# Altium PCB ADC-RDC.PcbDoc (part 2 of 2)
Units mm, origin at the board's own origin, x right, y up, seen from the top; angles counter-clockwise.
Board outline 88 x 48 mm, 4 copper layers (Top Layer, Int1, Int2, Bottom Layer), stack 1.48 mm thick; 188 components, 156 nets, 726 pads, 250 vias.
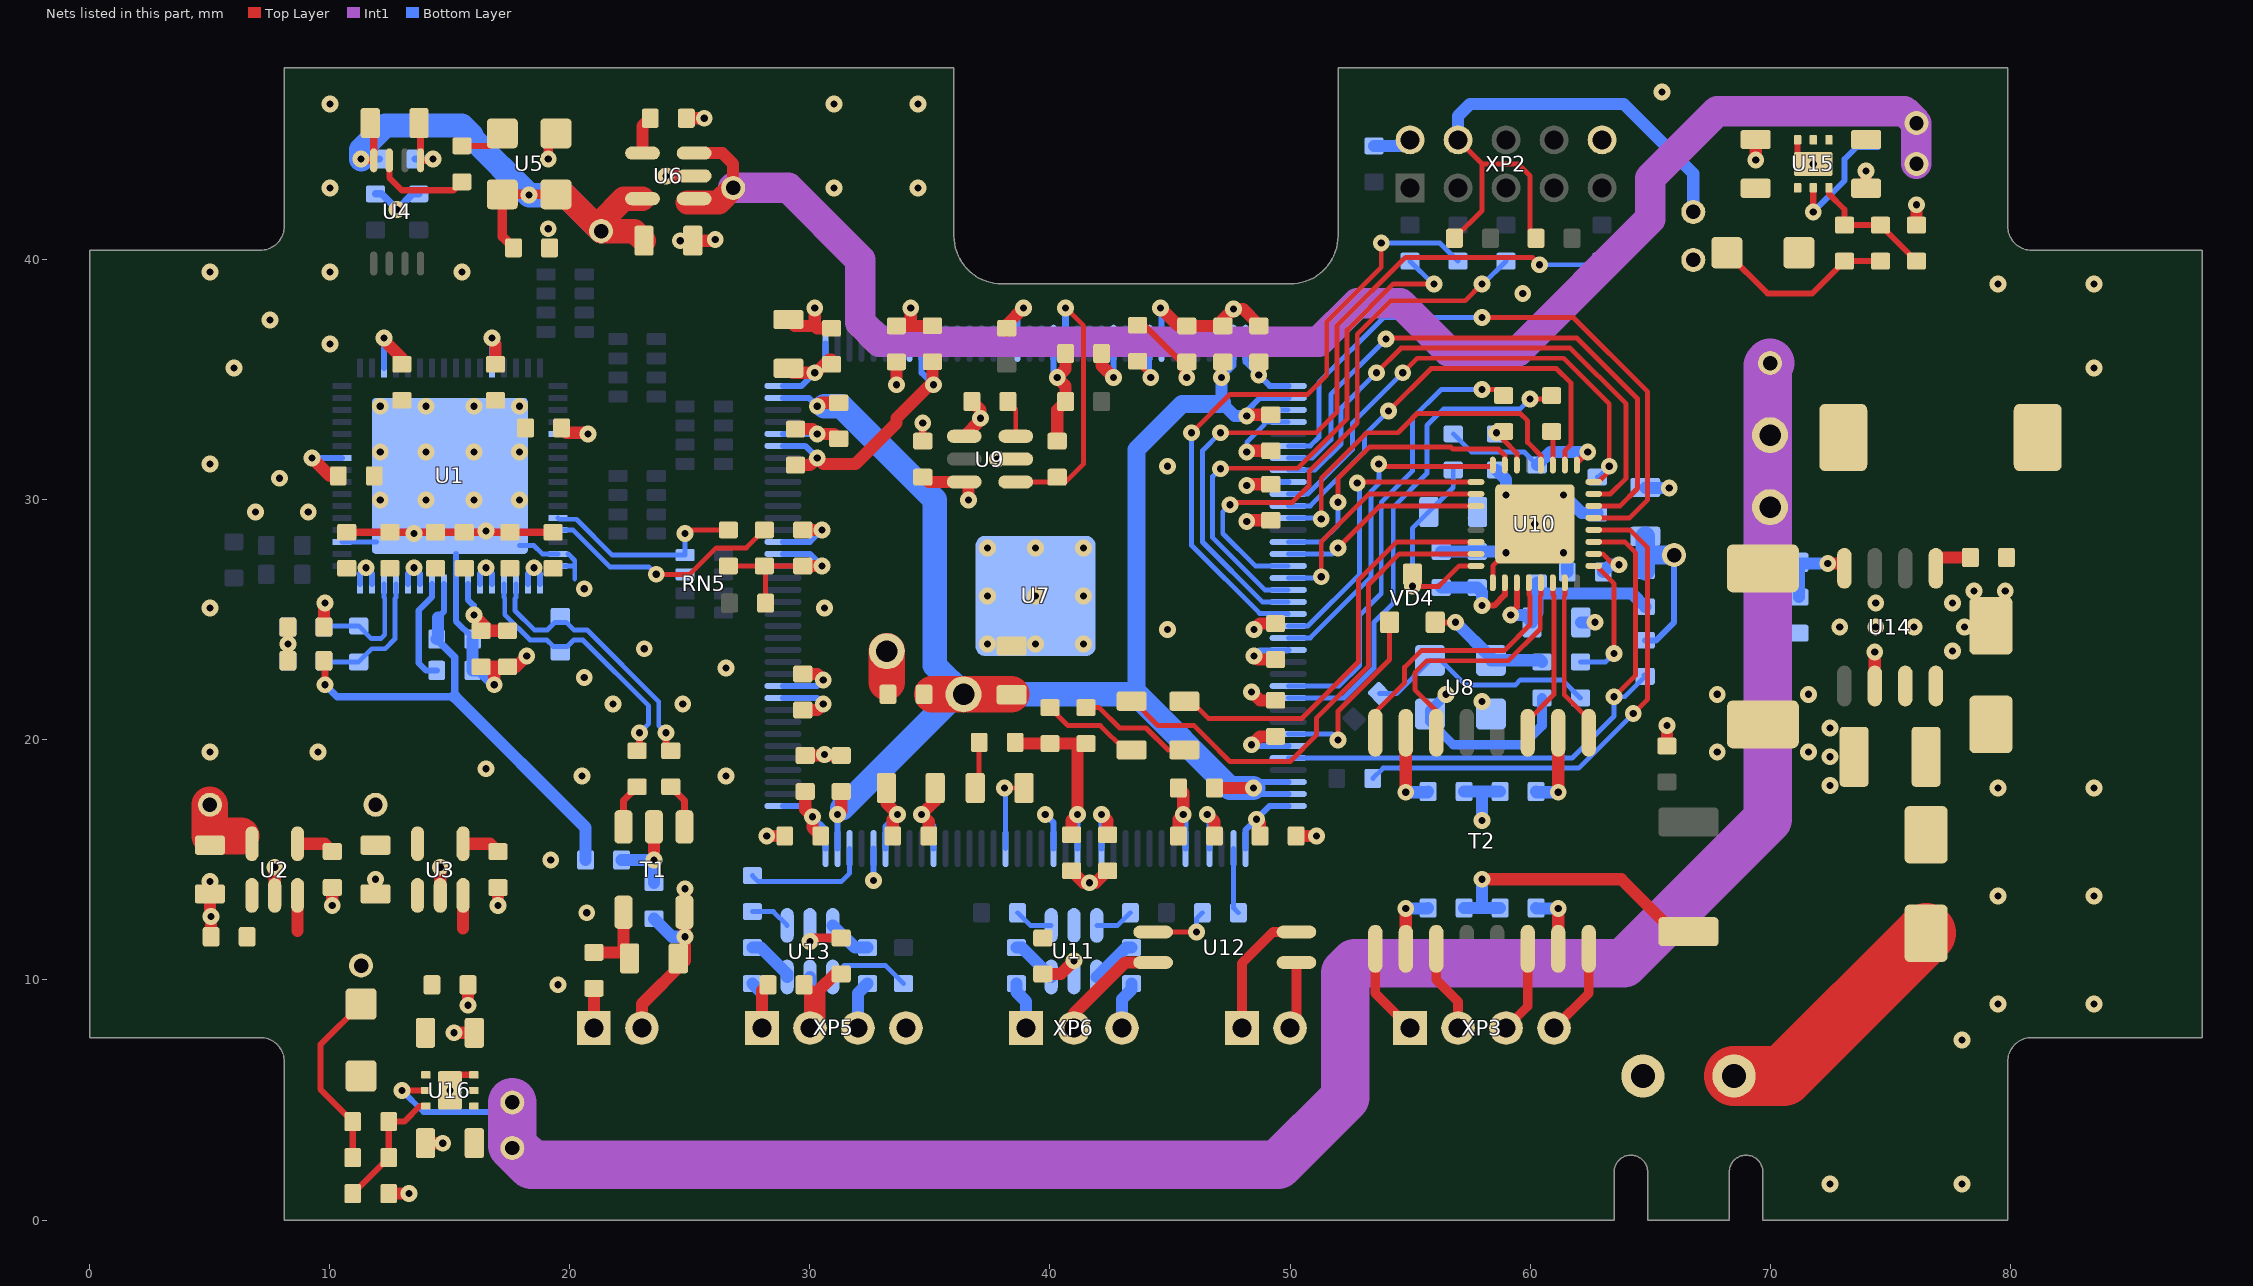
[diagram p4: the nets of this part, all layers, seen from the top]

## Via types
v1: diameter 0.7, hole 0.3, Top Layer to Bottom Layer, tented both sides, 250 vias

## Nets (pads, with @x,y where several pads share a name; then routed paths per layer and width w, separated by ;. In a path a pad name is that pad's centre, name@x,y a point inside that pad or via, vN(x,y) a via of type N, cw(c..) or ccw(c..) an arc to the next point about the centre after c; other vN are vias at no path point) (continued)
GND: C2.2 C4.1 C5.1 C6.2 C8.1 C9.1 C10.1 C11.1 C12.1 C13.1 C14.1 C15.1 C16.1 C17.1 C18.1 C19.1 C20.1 C21.1 C22.1 C23.1 C24.1 C27.1 C28.1 C29.1 C30.1 C31.1 C32.1 C33.1 C34.1 C35.1 C36.1 C37.1 C38.1 C39.1 C40.1 C41.1 C42.1 C43.1 C44.2 C45.1 C46.1 C47.1 C48.1 C49.1 C50.1 C51.1 C52.2 C53.1 C54.1 C55.1 C56.1 C57.1 C58.2 C59.1 C60.1 C61.2 C62.2 C63.2 C64.1 C66.1 C67.1 C68.1 C69.1 C70.2 C71.1 C72.1 C74.2 C75.2 C77.2 C78.2 C80.2 C81.2 FB2.2 R2.2 R5.1 R12.1 R14.1 R19.1 R30.1 R40.2 R41.2 R42.2 R52.1 R54.2 R56.2 R58.2 T1.4 TP6.1 U1.0 U1.3 U1.47 U1.48 U1.56 U2.2 U3.2 U4.5 U5.2 U6.2 U7.0 U7.3 U7.4 U7.42 U7.53 U7.63 U7.68 U7.83 U7.95 U7.104 U7.116 U7.125 U7.133 U7.137 U7.142 U8.2 U9.2 U10.1 U10.33 U11.2 U12.2 U13.2 U14.6 U15.6 U15.7 U16.6 U16.7 VD6.1 XP1.2 XP2.2 XP2.10 XP5.2 XP5.4 XP6.2 | length 150.4
  Top Layer w0.203: U10.1@58.45,26.55 58.45,27.25 v1(59,27.8) v1(60.2,29)
  Top Layer w0.254: U16.7@15.4,6.05 U16.6@16,6.05 ; U15.7@71.15,44.4 U15.6@71.15,45
  Top Layer w0.305: C16.1@10.7,28.65 C17.1@12.5,28.65 C18.1@14.4,28.65 C19.1@15.6,28.65 C20.1@17.5,28.65 C21.1@19.3,28.65 ; C31.1@13.716,45.7 13.775,45.641 U4.5@13.775,44.15 14.25,44.15 v1(14.3,44.2) ; C60.1@34.7,32.45 v1(34.7,33.2) ; v1(37.8,31.7) U9.2@38.575,31.7
  Top Layer w0.4: v1(19.1,44.2) 19.1,44.952 U5.2@19.418,45.27
  Top Layer w0.5: C6.2@9.75,24.7 9.75,25.65 v1(9.8,25.7)
  Top Layer w0.508: v1(5,14.1) C15.1@5,13.584 5,12.7 v1(5.05,12.65) C13.1@5.05,11.8 ; U2.2@7.7,13.525 v1(7.7,14.7) ; v1(10.1,13.1) C14.1@10.1,13.85 ; C24.1@11.9,13.584 v1(11.9,14.2) ; R58.2@12.45,1.1 v1(13.3,1.1) ; C80.2@13.984,3.2 v1(14.7,3.2) ; U3.2@14.6,13.525 v1(14.6,14.7) ; v1(15.166,7.8) C81.2@16.016,7.8 ; v1(15.75,8.95) C22.1@15.75,9.8 ; C5.1@16.3,23.05 16.85,23.05 ; v1(16.85,22.3) 16.85,23.05 ; v1(17,13.1) C23.1@17,13.85 ; v1(18.2,23.5) 17.75,23.05 16.85,23.05 ; XP1.2@23,8 23,9 24.8,10.8 v1(24.8,11.8) v1(24.8,13.8) ; v1(24,43.5) U6.2@25.175,43.5 ; v1(24.6,40.8) 26,40.8 v1(26.05,40.85) ; C27.1@24.85,45.9 v1(25.6,45.9) ; v1(28.2,16) C45.1@28.95,16 ; C52.2@29.1,37.516 29.366,37.25 30.2,37.25 ; C34.1@29.4,32.95 30.1,32.95 v1(30.3,32.75) 31,32.75 C56.1@31.2,32.55 ; C35.1@29.7,22.75 30.3,22.75 v1(30.55,22.5) ; C33.1@29.7,28.75 v1(30.5,28.75) ; R52.1@29.75,9.8 30,9.55 XP5.2@30,8 30.4,8.4 30.4,9.6 31.05,10.25 C72.1@31.3,10.25 ; C46.1@29.8,19.35 C55.1@31.3,19.35 ; v1(30.2,38) 30.2,37.25 ; C47.1@30.9,37.15 30.3,37.15 30.2,37.25 ; C48.1@33.6,37.25 34.2,37.25 ; v1(34.2,38) 34.2,37.25 ; C43.1@34.95,16 34.95,16.6 v1(34.65,16.9) 35.216,17.466 C44.2@35.216,18 ; C32.1@35.1,37.25 34.2,37.25 ; R19.1@38.2,37.05 38.2,37.3 v1(38.9,38) ; C42.1@40.9,14.55 41.4,14.05 v1(41.65,14.05) 41.9,14.05 C41.1@42.4,14.55 ; XP6.2@41,8 41,8.6 43.13,10.73 U12.2@44.3,10.73 ; C50.1@42.15,36.1 42.15,35.6 v1(42.65,35.1) ; v1(44.6,38) 45.35,37.25 C57.1@47.2,37.25 ; C40.1@45.35,16 45.35,16.7 v1(45.55,16.9) 45.55,17.8 C54.1@45.35,18 ; C57.1@47.15,37.275 47.15,37.45 v1(47.65,37.95) 48.05,37.95 48.7,37.3 C49.1@48.7,37.25 ; v1@48.2,29.15 C36.1@49.2,29.15 ; v1@48.3,32.05 C53.1@49.2,32.05 ; v1(48.4,22) 48.75,21.65 C38.1@49.4,21.65 ; v1(48.5,24.6) 48.75,24.85 C37.1@49.4,24.85 ; C39.1@50.25,16 v1(51.1,16) ; FB2.2@65.7,19.75 v1(65.7,20.6) ; v1(69.4,44.166) C78.2@69.4,45.016 ; C77.2@74,42.984 v1(74,43.7) ; U14.6@74.365,22.25 v1(74.365,23.665) ; R56.2@76.1,41.45 v1(76.1,42.3)
  Bottom Layer w0.203: U1.3@10.5,28.25 U1.0@11.95,28.25 ; U1.0@17.9,28.1 18.5,28.1 18.851,27.749 U1.47@19.5,27.75 ; U1.48@19.5,27.25 20.2,27.25 ; 19.926,27.75 20.2,27.476 20.2,27.25 ; 20.2,26.7 20.2,27.25 ; v1(48.2,32) 48.2,32.4 48.925,33.125 48.925,33.25 ; U7.4@49.925,33.25 48.925,33.25 ; U7.3@49.925,33.75 49.1,33.75 48.925,33.575 48.925,33.25
  Bottom Layer w0.254: C8.1@15.95,24.25 15.25,24.95 U1.56@15.25,26.5 ; U7.83@28.875,22.25 30.3,22.25 v1(30.55,22.5) ; U7.95@28.875,28.25 30,28.25 v1(30.5,28.75) ; U7.104@28.875,32.75 v1(30.3,32.75) ; v1(32.65,14.15) U7.68@32.65,15.475 ; U7.116@34.15,36.525 v1@34.15,37.95 ; v1(34.65,16.9) 35.15,16.4 U7.63@35.15,15.475 ; U7.125@38.65,36.525 38.65,37.75 v1(38.9,38) ; v1(39.8,16.9) 40.15,16.55 U7.53@40.15,15.475 ; v1(42.65,35.1) U7.133@42.65,36.425 ; v1(44.6,38) 44.65,37.95 U7.137@44.65,36.525 ; v1(45.55,16.9) 45.65,16.8 U7.42@45.65,15.475 ; U7.142@47.15,36.525 47.15,37.45 v1(47.65,37.95) ; U1.56@15.25,26.5 15.25,27.75 U1.56@15.25,26.5
  Bottom Layer w0.305: R12.1@11.9,42.75 12.15,42.75 v1(12.8,42.1) 13.45,42.75 R14.1@13.7,42.75 ; C30.1@13.55,44.2 v1(14.3,44.2)
  Bottom Layer w0.4: v1(56.5,21.9) 55.83,21.23 U8.2@55.83,21.082 55.83,20.77 56.8,19.8 59.7,19.8 60.5,20.6 C59.1@60.5,21.75
  Bottom Layer w0.5: C8.1@15.95,24.2 R5.1@15.95,22.9 16.25,22.9 v1(16.85,22.3) ; R30.1@53.5,44.75 54.75,44.75 XP2.2@55,45 ; C67.1@62.116,24.9 v1(62.7,24.9) ; C68.1@64.8,30.516 64.816,30.5 v1(65.8,30.5)
  Bottom Layer w0.508: C2.2@23.5,12.55 24.25,11.8 v1(24.8,11.8) ; XP5.2@30,8 U13.2@30,10.125 ; C63.2@56.3,27.85 C64.1@57.8,27.85 58.95,27.85 v1(59,27.8) v1(61.4,27.8) 61.55,27.65 R40.2@61.55,27 ; C62.2@57.25,17.85 58,17.85 ; v1(58,16.65) 58,17.85 ; R41.2@58.6,31.25 59,30.85 v1(59,30.2) ; C61.2@58.75,17.85 58,17.85 ; v1(61.4,30.2) 62.15,29.45 R42.2@62.8,29.45
  other v1: 72.5,1.5 78,1.5 15,5.4 78,7.5 79.5,9 83.5,9 19.5,9.8 20.7,12.8 79.5,13.5 83.5,13.5 19.2,15 79.5,18 83.5,18 72.5,18.1 20.5,18.5 26.5,18.5 16.5,18.8 72.5,19.3 30.6,19.4 5,19.5 9.5,19.5 67.8,19.5 71.6,19.5 72.5,20.5 21.8,21.5 24.7,21.5 67.8,21.9 71.6,21.9 20.6,22.6 26.5,23 77.6,23.7 23.1,23.8 37.4,24 39.4,24 41.4,24 44.9,24.6 72.9,24.7 74.4,24.7 76,24.7 78.1,24.7 5,25.5 30.6,25.5 74.4,25.7 77.6,25.7 37.4,26 39.4,26 41.4,26 78.5,26.2 79.8,26.2 20.6,26.3 37.4,28 39.4,28 41.4,28 13.5,28.6 16.5,28.7 48.2,29.1 6.9,29.5 9.1,29.5 12.1,30 14,30 16,30 17.9,30 7.9,30.9 44.9,31.4 5,31.5 12.1,32 14,32 16,32 17.9,32 12.1,33.9 14,33.9 16,33.9 17.9,33.9 6,35.5 83.5,35.5 10,36.5 7.5,37.5 59.7,38.6 79.5,39 83.5,39 5,39.5 10,39.5 15.5,39.5 19.1,41.3 10,43 31,43 34.5,43 71.8,44 10,46.5 31,46.5 34.5,46.5 65.5,47
INT_VDD_1_2: C63.1 C64.2 U10.2 | length 4
  Top Layer w0.254: v1(58,25.6) 58.5,25.6 58.95,26.05 U10.2@58.95,26.55
  Bottom Layer w0.508: C63.1@56.3,26.35 C64.2@57.8,26.35 58,26.15 v1(58,25.6)
LED0: U10.30 VD2.2 | length 17.5
  Top Layer w0.203: VD2.2@45.6,21.616 45.884,21.616 46.6,20.9 50.5,20.9 52.846,23.246 52.846,26.649 54.447,28.25 U10.30@57.75,28.25
LED1: U10.31 VD3.2 | length 21.4
  Top Layer w0.203: VD3.2@43.4,21.616 43.482,21.616 44.498,20.6 46.005,20.6 46.547,20.059 46.547,20.053 47.5,19.1 50,19.1 51.1,20.2 51.1,20.9 53.27,23.07 53.27,26.47 54.55,27.75 U10.31@57.75,27.75
LED_FPGA: U7.57 VD1.2 | length 3.4
  Top Layer w0.203: v1(38.1,18) VD1.2@38.916,18
  Bottom Layer w0.203: v1(38.1,18) 38.15,17.95 U7.57@38.15,15.475
MDC: R27.2 U10.12 | length 21.7
  Top Layer w0.203: U10.12@62.65,28.75 64.15,28.75 64.898,28.002 64.898,21.702 64.9,21.7 v1(64.3,21.1)
  Bottom Layer w0.203: R27.2@53.45,18.4 53.877,18.827 62.027,18.827 v1(64.3,21.1)
MDIO: R36.2 U7.32 U10.11 | length 25.1
  Top Layer w0.203: U10.11@62.65,28.25 63.95,28.25 64.4,27.8 64.4,22.7 v1(63.5,21.8)
  Bottom Layer w0.203: U7.32@49.925,19.25 61.75,19.25 63.5,21 v1(63.5,21.8) 63.95,21.8 R36.2@64.8,22.65 R36.2@64.75,22.7
MRn: R34.1 U9.3 | length 1.6
  Top Layer w0.203: R34.1@38.25,34.1 38.575,33.775 U9.3@38.575,32.65
N_POWER_ON: R46.1 U7.38 | length 2.8
  Bottom Layer w0.203: U7.38@47.65,15.475 47.65,13 R46.1@47.85,12.8
nCONF: R20.2 U7.129 U9.1 | length 11.4
  Top Layer w0.203: U9.1@38.575,30.75 40.65,30.75 41.4,31.5 41.4,37.25 v1(40.65,38)
  Bottom Layer w0.3: U7.129@40.65,36.525 v1(40.65,38)
NetC2_1: C2.1 R4.1 T1.2 | length 3.7
  Top Layer w0.508: v1(23.5,15) T1.2@23.5,16.378
  Bottom Layer w0.508: R4.1@22.15,15 v1(23.5,15) C2.1@23.5,14.05
NetC4_2: C4.2 C5.2 U1.55 | length 3.1
  Top Layer w0.508: v1(16,25.2) 16.65,24.55 C4.2@17.4,24.55
  Bottom Layer w0.254: U1.55@15.75,26.5 15.75,25.85 16,25.6 v1(16,25.2)
NetC6_1: C6.1 R6.1 R7.1 R8.1 | length 2.8
  Top Layer w0.4: R8.1@8.25,23.3 C6.1@8.25,24.7
  Bottom Layer w0.4: R7.1@8.25,23.3 R6.1@8.25,24.7
  other v1: 8.25,24
NetC14_2: C14.2 U2.4 | length 1.6
  Top Layer w0.508: U2.4@8.65,15.675 9.775,15.675 C14.2@10.1,15.35
NetC23_2: C23.2 U3.4 | length 1.6
  Top Layer w0.508: U3.4@15.55,15.675 16.675,15.675 C23.2@17,15.35
NetC27_2: C27.2 U6.4 | length 1.6
  Top Layer w0.508: U6.4@23.025,44.45 23.025,45.575 C27.2@23.35,45.9
NetC61_1: C61.1 T2.2 | length 2.6
  Top Layer w0.508: v1(61.175,17.825) T2.2@61.175,19.5
  Bottom Layer w0.508: C61.1@60.25,17.85 60.275,17.825 v1(61.175,17.825)
NetC62_1: C62.1 T2.7 | length 2.6
  Top Layer w0.508: v1(54.825,17.825) T2.7@54.825,19.5
  Bottom Layer w0.508: v1(54.825,17.825) 55.725,17.825 C62.1@55.75,17.85
NetC65_1: C65.1 R35.2 R37.2 | length 12.2
  Top Layer w0.508: v1(58,14.2) 63.8,14.2 65.986,12.014 C65.1@66.6,12.014
  Bottom Layer w0.508: R37.2@57.25,13 58,13 ; v1(58,14.2) 58,13 ; R35.2@58.75,13 58,13
NetC73_1: C73.1 U14.1 | length 2.9
  Top Layer w0.508: U14.1@76.9,27.6 C73.1@78.35,27.6 U14.1@76.9,27.6
NetC73_2: C73.2 L1.1 U14.8 VD6.2
NetC76_2: C76.2 R55.1 R56.1 U15.3 | length 5.4
  Top Layer w0.254: U15.3@72.45,43 72.45,42.75 73.1,42.1 R55.1@73.1,41.45 C76.2@74.6,41.45 R56.1@76.1,39.95
NetC79_2: C79.2 R57.1 R58.1 U16.3 | length 5.4
  Top Layer w0.254: R58.1@10.95,1.1 C79.2@12.45,2.6 R57.1@12.45,4.1 13.1,4.1 13.75,4.75 U16.3@14,4.75
NetL2_1: L2.1 U15.1
NetL3_1: L3.1 U16.1
NetR1_1: R1.1 T1.3 | length 1.9
  Top Layer w0.305: R1.1@24.2,18.05 24.77,17.48 T1.3@24.77,16.378
NetR3_1: R3.1 T1.1 | length 1.9
  Top Layer w0.305: T1.1@22.23,16.378 22.23,17.48 R3.1@22.8,18.05
NetR5_2: R5.2 U1.58 | length 4.4
  Bottom Layer w0.254: U1.58@14.25,26.5 14.25,25.95 13.7,25.4 13.7,23.2 14,22.9 R5.2@14.45,22.9
NetR15_1: R15.1 U5.3 | length 1.9
  Top Layer w0.254: R15.1@15.5,44.75 16.662,44.75 U5.3@17.182,45.27
NetR15_2: R15.2 U4.7 | length 4.1
  Top Layer w0.254: U4.7@12.475,44.15 12.475,43.425 13,42.9 15.15,42.9 R15.2@15.5,43.25
NetR28_1: R28.1 R29.1 U8.3 | length 9.8
  Bottom Layer w0.203: R28.1@53.73,21.93 54.442,21.93 U8.3@55.83,23.318 56.282,23.318 57.303,22.297 59.397,22.297 59.6,22.5 61.35,22.5 R29.1@62.1,21.75
NetR33_2: R33.2 VD1.1 | length 2
  Top Layer w0.203: VD1.1@36.884,18 37.05,18.166 R33.2@37.05,19.9
NetR35_1: R35.1 T2.15 | length 2.6
  Top Layer w0.508: T2.15@61.175,11.3 v1(61.175,12.975)
  Bottom Layer w0.508: R35.1@60.25,13 60.275,12.975 v1(61.175,12.975)
NetR37_1: R37.1 T2.10 | length 2.6
  Top Layer w0.508: T2.10@54.825,11.3 v1(54.825,12.975)
  Bottom Layer w0.508: v1(54.825,12.975) 55.725,12.975 R37.1@55.75,13
NetR40_1: R40.1 U10.10 | length 2
  Top Layer w0.203: U10.10@62.65,27.75 63.025,27.75 63.475,27.3 v1(63.7,27.3)
  Bottom Layer w0.508: R40.1@63.05,27 63.35,27.3 v1(63.7,27.3)
NetR43_1: R43.1 VD2.1 | length 4.8
  Top Layer w0.203: R43.1@41.5,21.35 42.05,21.35 42.9,20.5 44,20.5 44.916,19.584 VD2.1@45.6,19.584
NetR44_1: R44.1 VD3.1 | length 4.1
  Top Layer w0.203: R44.1@40,21.35 40.75,20.6 42.1,20.6 43.116,19.584 VD3.1@43.4,19.584
NetR46_2: R46.2 U12.1 | length 2.7
  Top Layer w0.203: U12.1@44.3,12 v1(46.1,12)
  Bottom Layer w0.203: v1(46.1,12) 46.1,12.55 R46.2@46.35,12.8
NetR51_1: R51.1 U13.4 | length 1.7
  Bottom Layer w0.203: R51.1@27.6,12.85 28.475,12.85 U13.4@29.05,12.275
NetR53_1: R53.1 R54.1 U14.4 | length 3.1
  Top Layer w0.508: v1(72.4,27.35) U14.4@72.895,27.35
  Bottom Layer w0.508: R54.1@71.2,25.95 R53.1@71.2,27.25 ; R53.1@71.2,27.35 R53.1@71.2,27.25 ; v1(72.4,27.35) 71.3,27.35 R53.1@71.2,27.25
NetTP4_1: TP4.1 VD5.1 | length 10.5
  Top Layer w2.5: TP4.1@68.5,6 70.55,6 VD5.1@76.5,11.95
NetU12_4: U12.4 XP4.1 | length 5.5
  Top Layer w0.4: XP4.1@48,8 48,10.7 49.3,12 U12.4@50.269,12
nRST_Eth: U7.30 VD4.1 | length 8
  Top Layer w0.203: v1(52,20) 52,21.2 54.15,23.35 VD4.1@54.15,24.9
  Bottom Layer w0.203: U7.30@49.925,20.25 51.75,20.25 v1(52,20)
nRSTEth: C70.1 R45.1 U10.32 VD4.3 | length 8.6
  Top Layer w0.203: v1(55.1,26.4) 56.2,26.4 57.05,27.25 U10.32@57.75,27.25
  Bottom Layer w0.203: v1(55.1,26.4) 55.1,28.816 56.8,30.516 R45.1@56.8,31.25
nSTAT: R24.2 U7.136 | length 2.3
  Top Layer w0.203: R24.2@43.6,35.75 44.2,35.15 v1(44.2,35.1)
  Bottom Layer w0.203: U7.136@44.15,36.525 44.15,35.15 v1(44.2,35.1)
PHY_XI: R29.2 U10.9 | length 5.5
  Top Layer w0.203: U10.9@62.75,27.25 63.5,26.5 v1(63.5,23.6)
  Bottom Layer w0.203: R29.2@62.1,23.25 63.15,23.25 v1(63.5,23.6)
POWER_GND: U12.3 XP4.2 | length 2.8
  Top Layer w0.4: XP4.2@50,8 50.269,8.269 U12.3@50.269,10.73
RX+RJ_45_3: T2.11 XP3.2 | length 3.7
  Top Layer w0.4: T2.11@56.095,11.3 56.095,10.005 57,9.1 XP3.2@57,8
RX-RJ_45_6: T2.9 XP3.1 | length 3.9
  Top Layer w0.4: T2.9@53.555,11.3 53.555,9.445 XP3.1@55,8
RX_C: R38.1 U7.27 | length 20.8
  Top Layer w0.203: v1(60,34.2) 60.75,34.2 R38.1@60.9,34.35
  Bottom Layer w0.203: U7.27@49.925,21.75 52.25,21.75 53.5,23 53.5,24.9 54.3,25.7 54.3,29.7 55.7,31.1 55.7,33.1 56.4,33.8 59.6,33.8 v1(60,34.2)
RX_D0: R42.1 U7.10 U10.16 | length 21.5
  Top Layer w0.203: v1(54.7,35.3) 55.3,35.9 61.4,35.9 63.3,34 v1(63.3,31.4) 63.3,31.2 62.85,30.75 U10.16@62.65,30.75
  Bottom Layer w0.203: U7.10@49.925,30.25 50.75,30.25 52.6,32.1 52.6,33.2 v1(54.7,35.3) ; R42.1@62.8,30.95 62.85,30.95 v1(63.3,31.4)
RX_D1: U7.8 U10.15 | length 22.7
  Top Layer w0.203: v1(53.6,35.3) 54.623,36.323 61.677,36.323 64,34 64,30.9 63.35,30.25 U10.15@62.65,30.25
  Bottom Layer w0.203: U7.8@49.925,31.25 51.047,31.25 52.123,32.326 52.123,33.823 v1(53.6,35.3)
RX_D2: U7.7 U10.14 | length 24.7
  Top Layer w0.203: v1(54,36.7) 54.046,36.746 61.954,36.746 64.477,34.223 64.477,30.477 63.75,29.75 U10.14@62.65,29.75
  Bottom Layer w0.203: U7.7@49.925,31.75 50.948,31.75 51.7,32.502 51.7,34.4 v1(54,36.7)
RX_D3: U7.6 U10.13 | length 26.9
  Top Layer w0.203: v1(58,37.6) 61.8,37.6 64.9,34.5 64.9,30 64.15,29.25 U10.13@62.65,29.25
  Bottom Layer w0.203: U7.6@49.925,32.25 50.85,32.25 51.2,32.6 51.2,34.9 53.9,37.6 v1(58,37.6)
RX_DV: U7.11 U10.18 | length 18.3
  Top Layer w0.203: v1(54.1,33.7) 55.877,35.477 61.1,35.477 61.7,34.877 61.7,32.3 61.45,32.05 U10.18@61.45,31.45
  Bottom Layer w0.203: U7.11@49.925,29.75 50.85,29.75 53.1,32 53.1,32.7 v1(54.1,33.7)
RXC_: R38.2 U10.19 | length 1.4
  Top Layer w0.203: R38.2@60.9,32.85 60.95,32.8 U10.19@60.95,31.45
RXER: U7.12 U10.20 | length 15
  Top Layer w0.203: v1(51.3,29.2) 51.3,30.9 53.2,32.8 54.5,32.8 55.3,33.6 59.6,33.6 59.9,33.3 59.9,32.4 60.45,31.85 U10.20@60.45,31.45
  Bottom Layer w0.203: U7.12@49.925,29.25 51.25,29.25 v1(51.3,29.2)
RXM: T2.8 U10.4 | length 11
  Top Layer w0.203: T2.8@53.555,20.3 53.555,21.155 54.777,22.377 54.777,23.033 55.467,23.723 58.925,23.723 60,24.798 60,26 59.95,26.05 U10.4@59.95,26.55
RXP: T2.6 U10.5 | length 10.8
  Top Layer w0.203: T2.6@56.095,20.3 56.095,21.205 55.2,22.1 55.2,22.798 55.702,23.3 59.1,23.3 60.423,24.623 60.423,26 60.45,26.027 U10.5@60.45,26.55
SCLK: R9.2 RN5.3 U1.45 | length 11.3
  Top Layer w0.203: v1(23.6,26.9) 25,26.9 26.1,28 27.35,28 R9.2@28.1,28.75
  Bottom Layer w0.203: U1.45@19.5,28.75 20.123,28.75 21.673,27.2 23.3,27.2 v1(23.6,26.9) RN5.3@24.8,26.9
SDIO: R10.2 RN5.4 U1.44 | length 8.7
  Top Layer w0.203: v1(24.8,28.6) 24.95,28.75 R10.2@26.6,28.75
  Bottom Layer w0.203: U1.44@19.5,29.25 19.553,29.197 20.275,29.197 21.771,27.7 RN5.4@24.8,27.7 v1(24.8,28.6)
SPARE__IN: R50.1 U13.3 | length 2
  Bottom Layer w0.508: R50.1@27.6,11.35 27.95,11.35 29.05,10.25 U13.3@29.05,10.125
SPARE__OUT: R49.1 U13.6 | length 1.8
  Bottom Layer w0.508: U13.6@30.95,12.275 31.875,11.35 R49.1@32.4,11.35
SPARE_IN: R51.2 U7.70 | length 5.3
  Bottom Layer w0.203: R51.2@27.6,14.35 27.85,14.1 31.3,14.1 31.65,14.45 U7.70@31.65,15.475
SPARE_OUT: R16.1 U13.1 | length 3.5
  Bottom Layer w0.203: U13.1@30.95,10.125 31.425,10.6 33.15,10.6 R16.1@33.9,9.85
TCK: R23.1 U7.18 | length 22.7
  Top Layer w0.203: v1(47.1,31.3) 47.122,31.322 50.322,31.322 52.377,33.377 52.377,37.075 54.302,39 v1(56,39)
  Bottom Layer w0.203: v1(47.1,31.3) 46.777,30.977 46.777,28.423 48.95,26.25 U7.18@49.925,26.25 ; R23.1@55,39.95 55.95,39 v1(56,39)
TDI: R21.1 U7.19 | length 30.7
  Top Layer w0.203: v1(47.1,32.8) 51.1,32.8 51.954,33.654 51.954,37.251 54.803,40.1 60.1,40.1 v1(60.4,39.8)
  Bottom Layer w0.203: v1(47.1,32.8) 46.354,32.054 46.354,28.248 48.852,25.75 U7.19@49.925,25.75 ; v1(60.4,39.8) 62.85,39.8 R21.1@63,39.95
TDO: R22.1 U7.20 | length 26.5
  Top Layer w0.203: v1(45.9,32.8) 47.5,34.4 50.73,34.4 51.53,35.2 51.53,37.426 53.8,39.695 v1(53.8,40.7)
  Bottom Layer w0.203: v1(45.9,32.8) 45.9,28.103 48.731,25.272 49.925,25.272 U7.20@49.925,25.25 ; v1(53.8,40.7) 56.25,40.7 R22.1@57,39.95
TMS: R25.1 U7.16 | length 22.8
  Top Layer w0.203: v1(47.5,29.8) 47.6,29.9 50.1,29.9 50.8,30.6 50.8,31.2 52.8,33.2 52.8,36.9 54.2,38.3 57.3,38.3 v1(58,39)
  Bottom Layer w0.203: v1(47.5,29.8) 47.2,29.5 47.2,28.6 48.55,27.25 U7.16@49.925,27.25 ; v1(58,39) 58.05,39 R25.1@59,39.95
TX+RJ_45_1: T2.16 XP3.4 | length 3.9
  Top Layer w0.4: XP3.4@61,8 62.445,9.445 T2.16@62.445,11.3
TX-RJ_45_2: T2.14 XP3.3 | length 3.7
  Top Layer w0.4: XP3.3@59,8 59.905,8.905 T2.14@59.905,11.3
TX__N: R48.1 U11.4 | length 2
  Bottom Layer w0.508: U11.4@41.95,10.125 43.175,11.35 R48.1@43.4,11.35
TX__P: R47.1 U11.6 | length 2
  Bottom Layer w0.508: R47.1@38.6,11.35 38.825,11.35 U11.6@40.05,10.125
TX_C: R39.1 U7.26 | length 18.9
  Top Layer w0.203: v1(58,34.6) 58.65,34.6 R39.1@58.9,34.35
  Bottom Layer w0.203: U7.26@49.925,22.25 52.05,22.25 52.9,23.1 52.9,25.2 53.8,26.1 53.8,29.9 55.1,31.2 55.1,33.4 56.3,34.6 v1(58,34.6)
TX_D0: U7.22 U10.24 | length 14.1
  Top Layer w0.203: v1@53.7,31.4 58.4,31.4 U10.24@58.45,31.45
  Bottom Layer w0.203: U7.22@49.925,24.25 50.85,24.25 53.372,26.772 53.372,30.346 53.7,30.674 v1(53.7,31.5)
TX_D1: U7.21 U10.25 | length 12.7
  Top Layer w0.203: v1@52.8,30.75 U10.25@57.75,30.75
  Bottom Layer w0.203: U7.21@49.925,24.75 50.75,24.75 52.9,26.9 52.9,30.6 v1(52.8,30.7)
TX_D2: U7.17 U10.26 | length 10.1
  Top Layer w0.203: v1(51.3,26.8) 51.3,28.25 53.3,30.25 U10.26@57.75,30.25
  Bottom Layer w0.203: U7.17@49.925,26.75 51.25,26.75 v1(51.3,26.8)
TX_D3: U7.15 U10.27 | length 8.7
  Top Layer w0.203: v1(52,28) 53.75,29.75 U10.27@57.75,29.75
  Bottom Layer w0.203: U7.15@49.925,27.75 51.75,27.75 v1(52,28)
TX_EN: U7.14 U10.23 | length 12.3
  Top Layer w0.203: v1(52,29.9) 52,30.9 53.3,32.2 56.7,32.2 56.778,32.122 58.678,32.122 58.95,31.85 U10.23@58.95,31.45
  Bottom Layer w0.203: U7.14@49.925,28.25 51.3,28.25 52,28.95 v1(52,29.9)
TX_n: R17.1 U11.3 | length 1.6
  Bottom Layer w0.203: U11.3@41.95,12.275 42.825,12.275 R17.1@43.35,12.8
TX_P: R18.1 U11.1 | length 1.6
  Bottom Layer w0.203: R18.1@38.65,12.8 39.175,12.275 U11.1@40.05,12.275
TXC: R39.2 R41.1 U10.22 | length 1.6
  Top Layer w0.203: R39.2@58.9,32.85 58.9,32.498 59.45,31.948 U10.22@59.45,31.45
  other v1: 58.6,32.8
TXM: T2.3 U10.6 | length 6.7
  Top Layer w0.203: T2.3@59.905,20.3 59.905,20.805 61,21.9 61,26 60.95,26.05 U10.6@60.95,26.55
TXP: T2.1 U10.7 | length 6.7
  Top Layer w0.203: U10.7@61.45,26.55 61.45,26.027 61.423,26 61.423,21.877 62.445,20.855 T2.1@62.445,20.3
VCC_1_8VA: C16.2 C17.2 C18.2 C19.2 C20.2 C21.2 C24.2 TP2.1 U1.49 U1.50 U1.53 U1.54 U1.59 U1.60 U1.63 U1.64 U3.5 | length 6.2
  Bottom Layer w0.254: U1.64@11.25,26.5 11.25,26.925 v1(11.5,27.175) 11.75,26.925 U1.63@11.75,26.5 ; U1.60@13.25,26.5 13.25,26.925 v1(13.5,27.175) 13.75,26.925 U1.59@13.75,26.5 ; U1.54@16.25,26.5 16.25,26.925 v1(16.5,27.175) 16.75,26.925 U1.53@16.75,26.5 ; U1.50@18.25,26.5 18.25,26.925 v1(18.5,27.175) 18.75,26.925 U1.49@18.75,26.5
VCC_1_8VD: C9.2 C10.2 C11.2 C12.2 C15.2 C32.2 C33.2 C34.2 R9.1 R10.1 R11.1 TP1.1 U1.10 U1.19 U1.28 U1.37 U2.5 U7.94 U7.103 U7.117 | length 32.2
  Top Layer w0.203: R10.1@26.6,27.25 R9.1@28.1,27.25 ; R11.1@28.15,25.7 28.15,27.2 R9.1@28.1,27.25 ; C33.2@29.7,27.25 R9.1@28.1,27.25
  Top Layer w0.508: v1(9.25,31.75) 10,31 C12.2@10.35,31 ; v1(12.25,36.75) 12.2,36.7 13,35.9 C9.2@13,35.65 ; v1(16.75,36.75) 16.7,36.7 16.9,36.5 C10.2@16.9,35.65 ; C11.2@19.65,33 19.85,32.8 20.7,32.8 v1(20.75,32.75) ; C34.2@29.4,31.45 30,31.45 v1(30.3,31.75) 30.55,31.5 31.9,31.5 33.6,33.2 33.6,33.4 35.05,34.85 35.1,34.85 C32.2@35.1,35.75 ; C33.2@29.7,27.25 v1(30.5,27.25)
  Top Layer w1.524: TP1.1@5,17.3 5,16 6.3,16
  Bottom Layer w0.254: v1(9.25,31.75) U1.10@10.5,31.75 ; U1.19@12.25,35.5 v1(12.25,36.75) ; U1.28@16.75,35.5 v1(16.75,36.75) ; U1.37@19.5,32.75 v1(20.75,32.75) ; U7.94@28.875,27.75 30,27.75 v1(30.5,27.25) ; U7.103@28.875,32.25 29.8,32.25 v1(30.3,31.75) ; U7.117@34.65,36.625 U7.117@34.65,36.525 34.65,35.3 v1(35.15,34.8)
VCC_2_8VA: C13.2 C22.2 C79.1 C81.1 L3.2 R57.2 TP8.1 U2.1 U2.3 U3.1 U3.3 | length 10.6
  Top Layer w0.254: C79.1@10.95,2.6 R57.2@10.95,4.1 9.6,5.45 9.6,7.3 L3.2@11.3,9
  Top Layer w0.508: 8.65,12.05 U2.3@8.65,13.525 ; 15.55,12.15 U3.3@15.55,13.625
VCC_3_3V_CLK: C28.2 C29.2 C30.2 C31.2 TP3.1 U4.8 U5.1 U5.4 U6.5 | length 27.2
  Top Layer w0.305: v1(11.3,44.2) 11.35,44.15 U4.8@11.825,44.15 11.825,45.559 C31.2@11.684,45.7
  Top Layer w0.4: C29.2@17.65,40.5 17.182,40.968 U5.4@17.182,42.73 U5.1@19.418,42.73
  Top Layer w1.016: U5.1@19.418,42.73 19.77,42.73 TP3.1@21.3,41.2 ; U6.5@23.025,42.55 22.25,42.55 21.3,41.6 TP3.1@21.3,41.2 ; C28.2@23.084,40.8 22.684,41.2 TP3.1@21.3,41.2
  Bottom Layer w0.305: v1(11.3,44.2) C30.2@12.05,44.2
  Bottom Layer w1.016: v1(11.3,44.2) 11.3,44.6 12.3,45.6 15.5,45.6 15.9,45.2 15.9,45.1 v1(18.3,42.7) 19.8,42.7 TP3.1@21.3,41.2
VCC_3_3VD: C35.2 C36.2 C37.2 C38.2 C39.2 C40.2 C41.2 C42.2 C43.2 C44.1 C45.2 C46.2 C47.2 C48.2 C49.2 C50.2 C51.2 C52.1 C59.2 C60.2 C68.2 C69.2 C71.2 C72.2 C76.1 C78.1 FB1.2 FB3.1 L2.2 pad.0@66,27.7 pad.0@66.8,40 pad.1@33.2,23.7 R20.1 R24.1 R26.1 R31.1 R32.1 R33.1 R34.2 R36.1 R43.2 R44.2 R45.2 R55.2 TP7.1 U7.1 U7.9 U7.23 U7.31 U7.36 U7.37 U7.40 U7.49 U7.51 U7.67 U7.72 U7.73 U7.82 U7.108 U7.109 U7.115 U7.128 U7.139 U7.144 U8.1 U8.4 U9.4 U9.6 U10.17 U11.5 U13.5 VD4.2 XP2.4 | length 117.6
  Top Layer w0.203: R34.2@36.65,34 R34.2@36.75,34.1 ; R31.1@56.85,40.9 58,42.05 58,44 ; XP2.4@57,45 58,44 ; R32.1@60.25,40.9 60,41.15 60,43.5 59.5,44 58,44
  Top Layer w0.254: R24.1@43.6,37.25 43.95,37.25 45.425,35.775 C51.2@45.65,35.775 ; VD4.2@56.05,24.9 v1(56.9,24.9) ; U10.17@61.95,31.45 61.95,31.55 v1(62.4,32) ; L2.2@68.2,40.3 69.9,38.6 71.75,38.6 R55.2@73.1,39.95 C76.1@74.6,39.95
  Top Layer w0.381: v1(30,11.6) 30.15,11.75 C72.2@31.3,11.75
  Top Layer w0.508: C52.1@29.1,35.484 29.284,35.3 v1(30.2,35.3) 30.25,35.3 30.8,35.85 C47.2@30.9,35.85 ; C35.2@29.7,21.25 30.3,21.25 v1(30.55,21.5) ; C46.2@29.8,17.85 29.8,17.1 v1(30.1,16.8) 30.1,16.35 C45.2@30.45,16 ; C44.1@33.184,18 33.184,17.366 v1(33.65,16.9) 33.45,16.7 C43.2@33.45,16 ; v1(33.6,34.8) C48.2@33.6,35.75 ; C60.2@34.7,31 34.95,30.75 U9.6@36.425,30.75 36.6,30.575 v1(36.6,30) ; U9.4@36.425,32.65 37.1,33.325 v1(37.1,33.4) 37.1,33.75 R34.2@36.75,34.1 ; R33.1@38.55,19.9 38.6,19.85 R44.2@40,19.85 R43.2@41.15,19.85 ; C71.2@39.7,10.25 40.45,10.25 v1(41,10.8) ; R20.1@40.3,32.45 40.3,33.75 R26.1@40.65,34.1 40.65,34.75 v1(40.3,35.1) 40.65,35.45 C50.2@40.65,36.1 ; C42.2@40.9,16.05 40.9,16.65 v1(41.15,16.9) R43.2@41.15,19.85 ; R43.2@41.5,19.85 R43.2@41.15,19.85 ; v1(42.15,16.9) 42.4,16.65 C41.2@42.4,16.05 ; C51.2@45.65,35.775 45.65,35.15 v1(45.7,35.1) ; v1(46.55,16.9) 46.85,16.6 C40.2@46.85,16 ; v1@48.2,30.65 C36.2@49.2,30.65 ; v1(48.4,19.8) 48.75,20.15 C38.2@49.4,20.15 ; v1@48.55,23.55 v1(48.5,23.5) 48.65,23.35 C37.2@49.4,23.35 ; v1(48.6,16.7) 48.75,16.55 C39.2@48.75,16 ; v1(48.7,35.2) C49.2@48.7,35.75
  Top Layer w1.524: 33.2,22.4 pad.1@33.2,23.7
  Bottom Layer w0.203: R45.2@56.8,32.75 57.55,32 59.75,32 C69.2@60.3,31.45
  Bottom Layer w0.254: U7.73@28.875,17.25 29.65,17.25 v1(30.1,16.8) 30.65,16.25 U7.72@30.65,15.475 ; U7.82@28.875,21.75 30.3,21.75 v1(30.55,21.5) ; U7.108@28.875,34.75 29.65,34.75 v1(30.2,35.3) 30.65,35.75 U7.109@30.65,36.525 ; U7.67@33.15,15.475 33.15,16.4 v1(33.65,16.9) ; v1(33.6,34.8) 33.65,34.85 U7.115@33.65,36.525 U7.115@33.65,36.625 ; U7.128@40.15,36.525 40.15,35.25 v1(40.3,35.1) ; U7.51@41.15,15.475 v1(41.15,16.9) ; U7.49@42.15,15.475 v1(42.15,16.9) ; v1@45.65,35.35 U7.139@45.65,36.525 ; v1(46.55,16.9) 46.65,16.8 U7.40@46.65,15.475 ; U7.37@48.15,15.475 48.15,16.25 v1(48.6,16.7) 49.15,17.25 U7.36@49.925,17.25 ; U7.144@48.15,36.525 48.15,35.75 v1(48.7,35.2) 49.15,34.75 U7.1@49.925,34.75 ; v1(48.2,30.6) 48.35,30.75 U7.9@49.925,30.75 ; v1(48.4,19.8) 48.45,19.75 U7.31@49.925,19.75 ; v1(48.5,23.5) 48.722,23.722 49.897,23.722 U7.23@49.925,23.75 ; R36.1@64.8,24.15 65.25,24.15 66,24.9 pad.0@66,27.7
  Bottom Layer w0.508: v1(56.9,24.9) 58.37,23.43 U8.4@58.37,23.318 60.432,23.318 C59.2@60.5,23.25 ; XP2.4@57,45 57,46 57.5,46.5 63.9,46.5 66.8,43.6 TP7.1@66.8,42 ; C69.2@60.3,31.45 60.85,32 v1(62.4,32)
  Bottom Layer w0.8: FB3.1@64.8,27.05 64.8,27.7 ; C68.2@64.8,28.484 64.8,27.7 ; pad.0@66,27.7 64.8,27.7
  other v1: 58,21.6
"VCC_4_3 VD": C75.1 C77.1 C80.1 L1.2 pad.0@17.6,3 pad.0@17.6,4.9 pad.0@26.8,43 pad.0@70,29.7 pad.0@76.1,44 pad.0@76.1,45.7 pad.1@70,32.7 R53.2 TP5.1 U6.1 U6.3 U15.2 U15.4 U15.5 U16.2 U16.4 U16.5 | length 163.3
  Top Layer w0.254: v1(13,5.4) U16.2@14,5.4 ; v1(71.8,42) U15.2@71.8,43
  Top Layer w0.508: U6.3@25.175,44.45 26.35,44.45 26.8,44 pad.0@26.8,43
  Top Layer w1: U6.1@24.9,42.4 26.2,42.4 pad.0@26.8,43
  Int1 w1.27: pad.0@26.8,43 29.1,43 32.1,40 32.1,37.4 32.9,36.6 51.2,36.6 52.8,38.2 54.6,38.2 56.6,36.2 59.5,36.2 65,41.7 65,43.4 67.8,46.2 75.6,46.2 pad.0@76.1,45.7 pad.0@76.1,44
  Int1 w2.032: pad.0@17.6,4.9 17.6,3.1 18.4,2.3 49.5,2.3 52.3,5.1 52.3,10.3 52.7,10.7 63.9,10.7 69.9,16.7 69.9,35.6 TP5.1@70,35.7
  Bottom Layer w0.254: v1(13,5.4) 13.9,4.5 17.2,4.5 pad.0@17.6,4.9 ; v1(71.8,42) 73.1,43.3 73.1,44.2 73.6,44.7 74.5,44.7
  Bottom Layer w0.508: R53.2@69.75,27.4 69.75,29.45 pad.0@70,29.7
VCC_IN: C74.1 U14.7 VD5.2
VCCA_3_3V: C53.2 C54.2 C55.2 C56.2 C57.2 C58.1 FB1.1 pad.1@36.4,21.9 U7.2 U7.34 U7.35 U7.71 U7.107 U7.143 | length 70.9
  Top Layer w0.508: v1(30.3,33.9) 30.45,34.05 C56.2@31.2,34.05 ; v1(31.15,16.9) 31.3,17.05 C55.2@31.3,17.85 ; C58.1@38.384,21.9 C58.1@38.4,21.884 ; C54.2@46.85,18 48.375,18 48.425,18.05 v1(48.475,18) ; v1(47.15,35.1) C57.2@47.15,35.775 ; v1@48.2,33.55 C53.2@49.2,33.55
  Top Layer w1.524: FB1.1@35.1,21.9 pad.1@36.4,21.9 C58.1@38.384,21.9
  Bottom Layer w0.254: U7.107@28.875,34.25 29.95,34.25 v1(30.3,33.9) ; U7.71@31.15,15.475 v1(31.15,16.9) ; v1(47.15,35.1) 47.65,35.6 U7.143@47.65,36.525 ; v1(48.2,33.5) 48.2,33.7 48.75,34.25 U7.2@49.925,34.25 ; U7.35@49.925,17.75 48.725,17.75 v1(48.475,18) 48.725,18.25 U7.34@49.925,18.25
  Bottom Layer w0.508: v1(47.15,35.1) 47.15,34.05 47.7,33.5 v1(48.2,33.5)
  Bottom Layer w0.762: 43.6,21.9 43.6,32.1 45.5,34 47.1,34 47.15,34.05
  Bottom Layer w1.016: v1@30.6,33.9 31.3,33.9 35.2,30 35.2,23.1 pad.1@36.4,21.9 ; v1@31.35,17.15 36.1,21.9 pad.1@36.4,21.9 ; v1(48.475,18) 47.5,18 43.6,21.9 pad.1@36.4,21.9
VCM: C8.2 R4.2 R8.2 U1.57 | length 20.8
  Top Layer w0.3: R8.2@9.75,23.3 9.8,23.25 v1(9.8,22.3)
  Bottom Layer w0.254: 14.5,25.1 14.75,25.35 U1.57@14.75,26.5
  Bottom Layer w0.3: v1(9.8,22.3) 10.3,21.8 15.2,21.8 15.2,23.45 C8.2@14.45,24.2
  Bottom Layer w0.508: C8.2@14.45,24.2 14.5,24.25 14.5,25.1 ; 15.2,21.8 20.65,16.35 R4.2@20.65,15
VDDA_3_3: C66.2 C67.2 FB3.2 U10.3 | length 9
  Top Layer w0.254: v1(59.2,25.2) 59.2,25.3 59.45,25.55 U10.3@59.45,26.55
  Bottom Layer w0.508: v1@59.1,25.2 v1(59.2,25.2) 59.784,25.2 C67.2@59.984,25 ; C67.2@60.084,24.9 C67.2@59.984,25 ; C66.2@60.3,26.55 60.3,26.1 ; FB3.2@64.8,25.55 64.25,26.1 60.3,26.1 ; C67.2@59.984,25 60.3,25.316 60.3,26.1
VIN+A: C3.1 R1.2 U1.51 | length 11.2
  Top Layer w0.305: v1(24,20.3) 24,19.75 R1.2@24.2,19.55
  Bottom Layer w0.203: U1.51@17.75,26.5 17.75,25.93 17.71,25.89 17.71,25.39 18.514,24.586 19.064,24.586 19.378,24.9 19.849,24.9 20.163,24.586 20.713,24.586 23.7,21.599 23.7,20.6 v1(24,20.3)
VIN+B: C7.1 R6.2 U1.62 | length 5
  Bottom Layer w0.203: R6.2@9.75,24.7 9.8,24.75 C7.1@11.2,24.75 11.727,24.223 12.125,24.223 12.287,24.385 12.287,25.913 12.25,25.95 U1.62@12.25,26.5
VIN-A: C3.2 R3.2 U1.52 | length 11.1
  Top Layer w0.305: R3.2@22.8,19.55 22.9,19.65 v1(22.9,20.3)
  Bottom Layer w0.203: U1.52@17.25,26.5 17.25,25.95 17.287,25.913 17.287,25.215 18.339,24.162 19.038,24.162 19.3,23.9 19.9,23.9 20.162,24.163 20.537,24.163 23.277,21.423 23.277,20.677 v1(22.9,20.3)
VIN-B: C7.2 R7.2 U1.61 | length 5.7
  Bottom Layer w0.203: R7.2@9.75,23.3 9.8,23.25 C7.2@11.2,23.25 11.75,23.8 12.3,23.8 12.71,24.21 12.71,25.89 12.75,25.93 U1.61@12.75,26.5
VIN_A: C1.1 R2.1 T1.6 | length 3.3
  Top Layer w0.5: C1.1@21,11.15 R2.1@22.234,11.15 ; T1.6@22.23,12.822 22.23,11.154 R2.1@22.234,11.15 ; R2.1@22.484,10.9 R2.1@22.234,11.15
X_SPARE_IN: R50.2 R52.2 XP5.1 | length 3.9
  Top Layer w0.508: XP5.1@28,8 28,9.55 R52.2@28.25,9.8
  Bottom Layer w0.508: R50.2@27.6,9.85 28,9.45 XP5.1@28,8
X_SPARE_OUT: R49.2 XP5.3 | length 2
  Bottom Layer w0.508: XP5.3@32,8 32,9.45 R49.2@32.4,9.85
X_TX_N: R48.2 XP6.3 | length 2
  Bottom Layer w0.508: XP6.3@43,8 43,9.2 43.4,9.6 R48.2@43.4,9.85
X_TX_P: R47.2 XP6.1 | length 2
  Bottom Layer w0.508: R47.2@38.6,9.85 38.6,9.5 39,9.1 XP6.1@39,8
XVIN_A: C1.2 XP1.1 | length 1.6
  Top Layer w0.5: XP1.1@21,8 C1.2@21,9.65
pads on no net: RN4.1 RN4.8 RN5.1 RN5.8 T2.4 T2.5 T2.12 T2.13 U1.4 U1.5 U1.6 U1.7 U1.8 U1.9 U1.11 U1.12 U1.13 U1.14 U1.15 U1.16 U1.17 U1.18 U1.20 U1.21 U1.22 U1.23 U1.25 U1.26 U1.43 U4.1 U4.4 U4.6 U7.5 U7.13 U7.29 U7.39 U7.41 U7.43 U7.45 U7.46 U7.47 U7.48 U7.50 U7.52 U7.54 U7.55 U7.56 U7.58 U7.60 U7.61 U7.62 U7.64 U7.66 U7.69 U7.74 U7.75 U7.76 U7.77 U7.78 U7.79 U7.80 U7.81 U7.84 U7.85 U7.86 U7.87 U7.89 U7.90 U7.96 U7.97 U7.120 U7.121 U7.122 U7.123 U7.124 U7.127 U7.130 U7.131 U7.132 U7.134 U7.135 U7.140 U7.141 U9.5 U10.8 U10.21 U14.2 U14.3 U14.5 XP2.6 XP2.7 XP2.8

## Polygon pours and split planes (outlines as drawn)
VCC_1_8VA on Top Layer "Top Layer-No Net 3" (solid, remove dead copper, pour order 46): 11.3,15.4 14,15.4 14,16.7 15,17.5 15,25.7 15.3,26 18.5,26 19,26.5 19,27.5 18.8,27.7 10.9,27.7 10.7,27.5 10.7,16.7 11.3,16.1
VCC_3_3VD on Top Layer "Bottom Layer-No Net" (solid, remove dead copper, pour order 36): 66,42.6 66,41.3 66,39.8 66.5,39.3 68.7,39.3 68.9,39.5 68.9,41.3 69.6,42 69.8,42.2 69.8,43.3 66.7,43.3
NetL2_1 on Top Layer "Bottom Layer-No Net" (solid, remove dead copper, pour order 37): 71.7,40.9 71,41.6 71,42.4 71,42.6 71.3,42.9 71.3,43.1 71.2,43.2 70.5,43.2 70.4,43.1 70.4,40.1 70.5,40 71.6,40 71.7,40.1
"VCC_4_3 VD" on Top Layer "Bottom Layer-No Net" (solid, remove dead copper, pour order 38): 71.7,44.8 71.7,45.8 72.3,46.4 76.7,46.4 77.4,45.7 77.4,43.8 76.9,43.3 75.7,43.3 74.6,44.4 73.5,44.4 73.1,44.8
"VCC_4_3 VD" on Top Layer "Bottom Layer-No Net" (solid, remove dead copper, pour order 39): 15.8,5.5 18,5.5 18.6,4.9 18.6,2.9 18,2.3 15.8,2.3 15.4,2.6 15.4,3.7 15.8,4.1
NetL3_1 on Top Layer "Bottom Layer-No Net" (solid, remove dead copper, pour order 40): 11.9,5.5 12.6,6.2 13.4,6.2 13.6,6.2 13.9,5.9 14.1,5.9 14.2,6 14.2,6.7 14.1,6.8 11.1,6.8 11,6.7 11,5.6 11.1,5.5
VCC_2_8VA on Top Layer "Bottom Layer-No Net" (solid, remove dead copper, pour order 41): 15.8,11.2 15.8,12.2 15.1,12.2 14.3,12.2 13.9,12.6 13.9,14 13.1,14 13.1,12.6 12.5,12.2 11.8,12.2 7.8,12.2 7.45,12.2 7,12.65 7,14 6.2,14 6.2,11.1 7.6,9.7 9.1,9.7 10.5,8.3 12.3,8.3 13,7.6 13.2,7.4 14.3,7.4 14.3,8.3 15,9 15,10.4 15.5,10.9
NetC73_2 on Top Layer "Bottom Layer-No Net" (solid, pour order 42): 81.1,34.7 81.7,34.1 83.7,32.1 83.7,30.7 83.7,22.5 80.7,19.5 79.5,19.5 78.8,19.5 78.6,19.6 76.8,21.5 76.8,22.8 80,22.8 80.5,23.3 80.5,26.9 79.4,27.9 79.4,30.6 79.4,33.9 80.2,34.7
"VCC_4_3 VD" on Top Layer "Top Layer-No Net" (solid, remove dead copper, pour order 43): 67.5,36.1 68.4,37 73.1,37 74,36.1 74,30.8 71.6,28.4 71.6,26.5 71.3,26.2 67.8,26.2 67.5,26.5 67.5,33.8
VCC_IN on Top Layer "Top Layer-No Net 3" (solid, pour order 44): 75.3,22.4 75.9,22.4 75.9,21.1 76.3,20.7 77.7,19.3 77.7,19 77.7,15.3 77.4,15 75.7,15 75,15.7 75,16.4 75,21 75.3,21.3
GND on Top Layer "Int1-No Net" (solid, remove dead copper, pour order 56): 9,48 79,48 79,40 84,40 84,8.5 79,8.5 79,0 9,0 9,9.5 4,9.5 4,40 9,40
GND on Int2 "Top Layer-No Net 3" (solid, remove dead copper, pour order 45): 0,48 88,48 88,0 0,0
"VCC_4_3 VD" on Bottom Layer "Top Layer-No Net 3" (solid, remove dead copper, pour order 47): 69,36.5 72,36.5 74.05,38.55 74.05,45.45 75.6,47 77.1,47 78.45,45.65 78.45,38.25 72,31.8 72,29.4 71.4,28.8 68.6,28.8 67.8,29.6 67.8,35.3
GND on Bottom Layer "Int1-No Net" (solid, remove dead copper, pour order 58): 9,48 79,48 79,40 84,40 84,8.5 79,8.5 79,0 9,0 9,9.5 4,9.5 4,40 9,40
VCC_3_3VD on Int1 "Top Layer-No Net 3" (solid, remove dead copper, pour order 28): 32.5,31.8 31.6,32.75 30.3,32.75 29.175,33.975 29.2,35.4 29.8,36 30.95,36 31.5,35.45 52.5,35.45 52.975,34.975 60.5,34.975 66,40.475 66,42.6 66.4,43 70.1,43 70.4,42.7 70.4,38.5 68,36.1 68,25.8 67.2,25 60.2,18 56.8,18 49.1,10.3 30.6,10.3 29.4,11.5 29.4,20.6 32.5,23.7
VCC_1_8VD on Int1 "Int1-No Net" (solid, remove dead copper, pour order 26): 4,16.5 4,36 6,38 22.5,38 28.5,32 31,32 31.5,31.5 31.5,26.7 28.4,23.6 26.9,23.6 23.9,23.6 21,26.5 21,29.5 20,30.5 11,30.5 10,29.5 10,16.5 9.5,16 4.5,16
GND on Int1 "Int1-No Net" (solid, remove dead copper, pour order 54): 0.5,48 87.5,48 87.5,0 0.5,0

## Keep-outs
Keep-Out Layer:
  lines w0.1: 0,7.6 7.1,7.6 cw(c7.1,6.6) 8.1,6.6 8.1,0 8.6,0 18,0 63.5,0 63.5,2 cw(c64.2,2) 64.9,2 64.9,0 68.3,0 68.3,2 cw(c69,2) 69.7,2 69.7,0 79.9,0 79.9,6.6 cw(c80.9,6.6) 80.9,7.6 88,7.6 88,40.4 80.9,40.4 cw(c80.9,41.4) 79.9,41.4 79.9,48 79.4,48 52,48 52,41 cw(c50,41) 50,39 38,39 cw(c38,41) 36,41 36,48 8.6,48 8.1,48 8.1,41.4 cw(c7.1,41.4) 7.1,40.4 0,40.4 0,7.6

## Other copper
Top Layer:
  pour cut-out: 64.932,15.808 65.251,15.808 68.26,15.808 68.26,12.8 65,12.8 64.932,12.8
  pour cut-out: 78.9,36.7 79.3,36.3 79.3,29.3 78.747,28.703 75.2,28.7 74.4,29.5 74.4,35.9 75.1,36.7
Int1:
  pour cut-out: 53.547,9.453 53.6,9.4 62.9,9.4 62.9,6.6 62.9,6.706 62.594,6.706 53.547,6.706
Int2:
  pour cut-out: 53.547,9.453 53.6,9.4 62.9,9.4 62.9,6.6 62.9,6.706 62.594,6.706 53.547,6.706
Bottom Layer:
  pour cut-out: 10.935,25.935 10.935,27.035 19.035,27.035 19.035,25.935
  pour cut-out: 20.065,26.935 18.965,26.935 18.965,35.035 20.065,35.035
  pour cut-out: 19.065,36.065 19.065,34.965 10.965,34.965 10.965,36.065
  pour cut-out: 9.935,35.065 11.035,35.065 11.035,26.965 9.935,26.965
  pour cut-out: 48.5,37.6 48.5,35.5 30.3,35.5 30.3,37.6
  pour cut-out: 51,16.9 48.9,16.9 48.9,35.1 51,35.1
  pour cut-out: 30.3,14.4 30.3,16.5 48.5,16.5 48.5,14.4
  pour cut-out: 27.8,35.1 29.9,35.1 29.9,16.9 27.8,16.9

## Silkscreen, mask and mechanical layers (free items; w line width, h text height)
Top Overlay:
  text "3V3" at 65.2,43 h1
  text "3V3_CLK" at 19.5,38.1 h1
  text "4V3" at 65.7,35.1 h1
  text "1V8D" at 4.4,18.5 h1
  text "1V8A" at 11.3,18.5 h1
  text "2V8" at 12.5,11 h1
  text "GND" at 63.7,8 h1
  text "+12V" at 67.7,8 h1
  text "ADC-RDC" at 71.9,5.6 h1
  text "03/2021" at 72,3.9 h1
  text "PWR_ON" at 46.1,0.4 h1
  text "ADC" at 20.7,0.3 h1
  text "SPARE I/O" at 26.9,0.3 h1
  text "TX" at 40,0.3 h1
  text "ETHERNET" at 54.4,0.3 h1

## Text inside footprints (layer, text, board x,y; h text height)
C75: Mechanical 1 "+" at 70.249,26.099 h0.75 r270